# Altium PCB M8充电器.PcbDoc
Units mm, origin at the board's own origin, x right, y up, seen from the top; angles counter-clockwise.
Board outline 132.08 x 76.33 mm, 2 copper layers (Top Layer, Bottom Layer); 91 components, 64 nets, 274 pads, 42 vias.
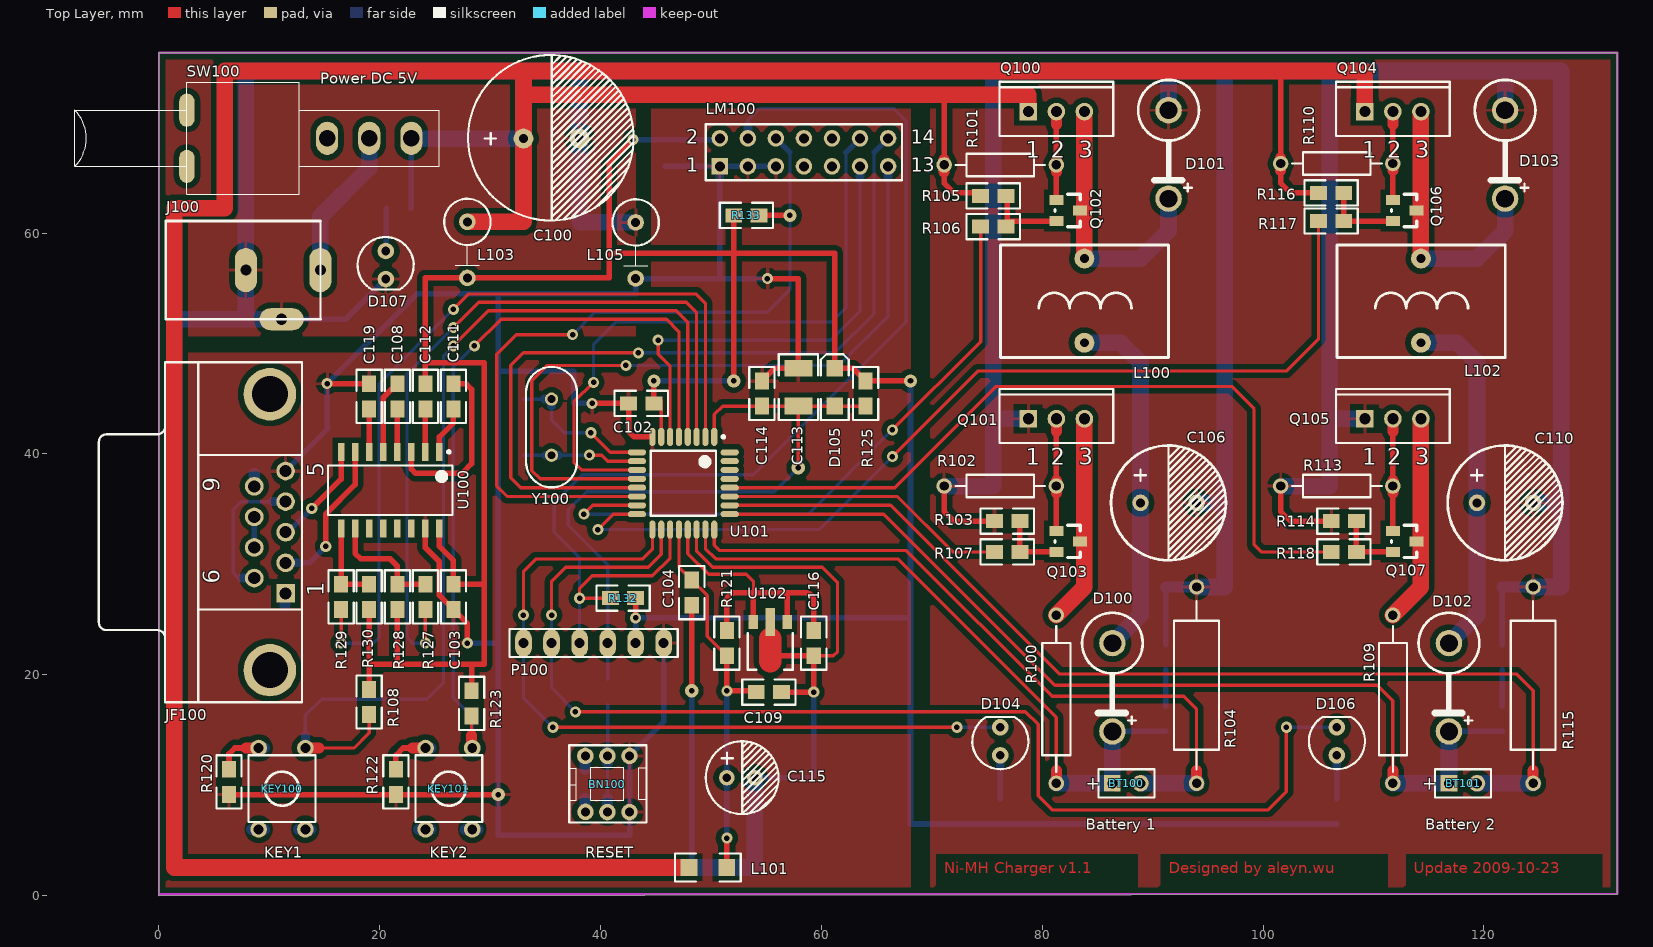
[diagram p0: Top Layer view]
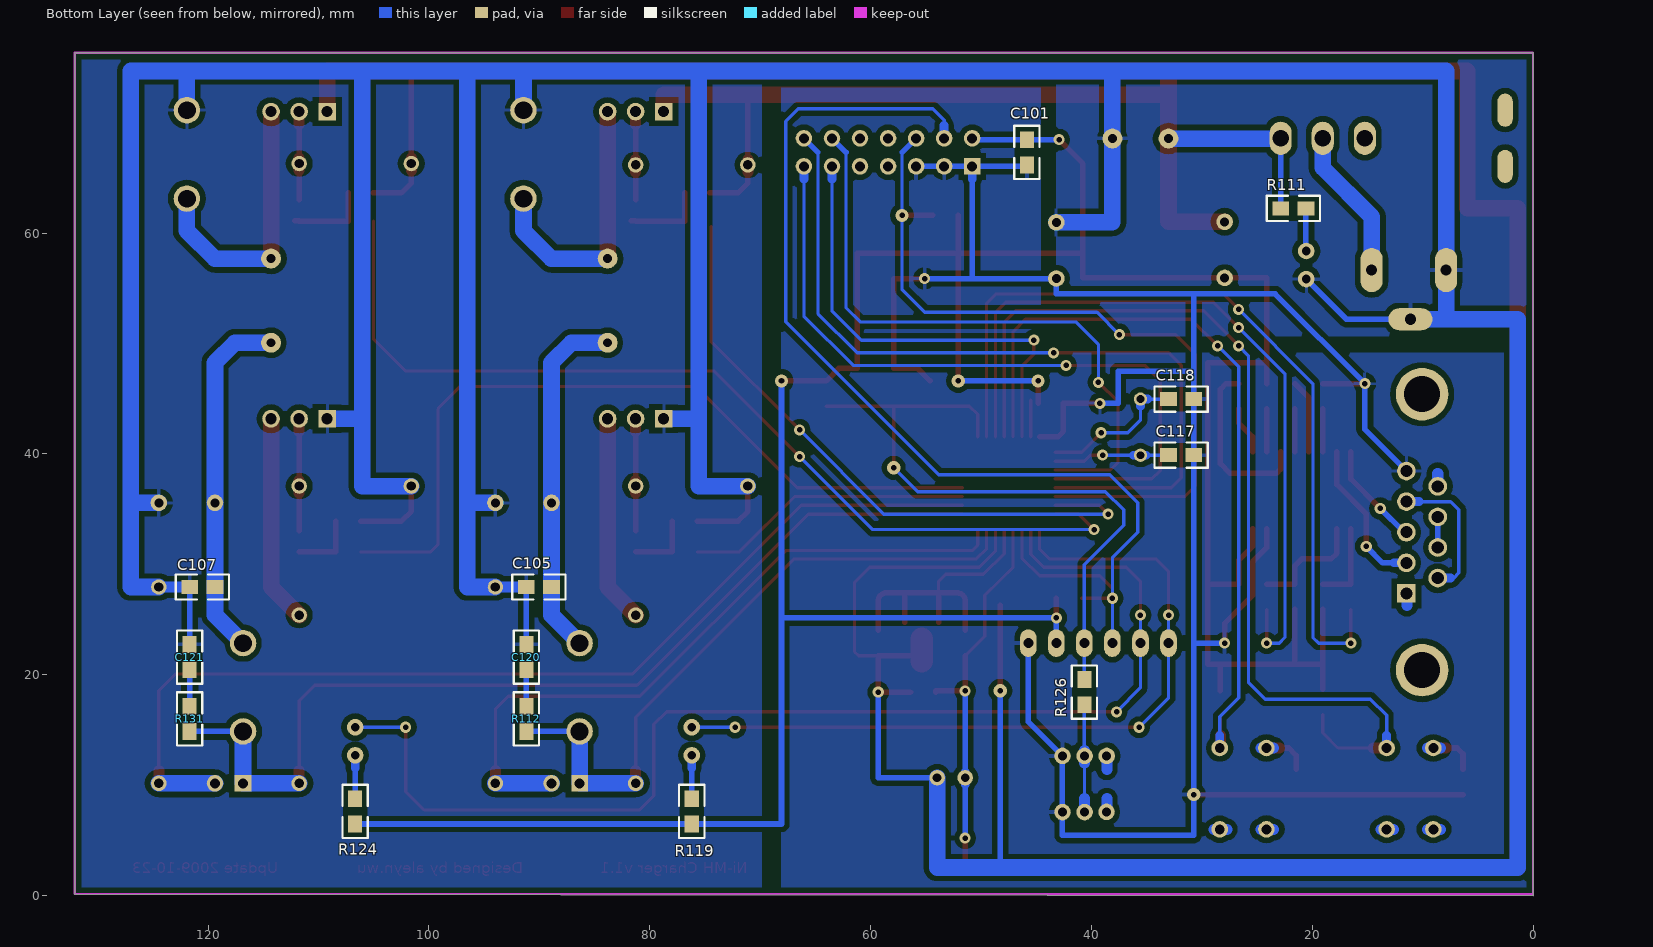
[diagram p1: Bottom Layer view, seen from below]

## Layer stack, top to bottom
Top Layer: signal copper 0.0356
Dielectric: dielectric 0.32, FR-4, Dk 4.8
Bottom Layer: signal copper 0.0356

## Board outline
0,0 132.08,0.127 132.08,76.327 0,76.327

## Design rules (kind name [scope] priority, off if disabled: settings)
Clearance Clearance_1 [InNamedPolygon('agnd1') Or InNamedPolygon('agnd2') Or  InNamedPolygon('agnd3') Or InNamedPolygon('agnd4') Or  InNamedPolygon('agnd5') Or InNamedPolygon('agnd6')] p1: gap=0.5
Clearance [All] p2: gap=0.3
PlaneConnect [All] p1: planeconnectstyle=Relief reliefexpansion=0.5 reliefentries=4 reliefconductorwidth=0.3 reliefairgap=0.3
PolygonConnect [All] p1: connectstyle=Relief reliefconductorwidth=0.3 reliefentries=4 polygonreliefangle="90 Angle"
RoomDefinition M8充电器 [InComponentClass('M8充电器')] p1: confinementstyle=ConfineIn formatcopy=TRUE lockcomponents=FALSE outline 0,0.127 132.08,0.127 132.08,76.327 0,76.327
RoutingVias [All] p1: holewidth=0.5 width=0.8 viastyle="Through Hole" minholewidth=0.5 minwidth=0.8 maxholewidth=1 maxwidth=1.5
SolderMaskExpansion [All] p1: expansion=0.102
TestPointUsage [All] p1: valid=0 allowmultiple=FALSE
Testpoint [All] p1: side=15 testpointundercomponent=TRUE minsize=1.016 maxsize=2.54 preferedsize=1.524 minholesize=0 maxholesize=1.016 preferedholesize=0.813 testpointgrid=0.025 style=1023 order=0123456789
Width [All] p1: maxlimit=1.5 minlimit=0.3 preferedwidth=0.5
18 further rules are at their usual default settings.

## Components (designator, comment, footprint, x,y, rotation, side; value= is the part's Value field where it differs from the comment)
BN100 "LUCKBUTTON" LBTN-01 44.164,6.609 r90 top
BT100 "Battery" BAT-2 87.63,10.16 r0 top
BT101 "Battery" BAT-2 118.11,10.16 r0 top
C100 "1000uF/50V" C1000uF/50V 33.02,68.555 r0 top
C101 "104" 0805 45.847,66.167 r90 bottom
C102 "104" 0805 42.545,44.577 r0 top
C103 "104" 0805 26.67,28.194 r270 top
C104 "104" 0805 48.26,28.575 r270 top
C105 "104" 0805 88.9,27.94 r0 bottom
C106 "470uF/35V" C1000uF/16V 88.9,35.56 r0 top
C107 "104" 0805 119.38,27.94 r0 bottom
C108 "105" 0805 21.59,44.069 r90 top
C109 "104" 0805 54.102,18.415 r0 top
C110 "470uF/35V" C1000uF/16V 119.38,35.56 r0 top
C111 "105" 0805 26.67,46.355 r270 top
C112 "105" 0805 24.13,44.069 r90 top
C113 "100uF" 1210 57.912,44.323 r90 top
C114 "0.1uF" 0805 54.61,44.323 r90 top
C115 "10u" C100UF/10V 53.975,10.668 r0 top
C116 "103" 0805 59.309,21.717 r90 top
C117 "22pF" 0805 33.02,39.878 r180 bottom
C118 "22pF" 0805 33.02,44.958 r180 bottom
C119 "105" 0805 19.05,46.355 r270 top
C120 "104" 0805 91.186,20.447 r90 bottom
C121 "104" 0805 121.666,20.447 r90 bottom
D100 "1N5819" IN5822 86.36,22.86 r270 top
D101 "1N5819" IN5822 91.44,71.12 r270 top
D102 "1N5819" IN5822 116.84,22.86 r270 top
D103 "1N5819" IN5822 121.92,71.12 r270 top
D104 "Red_LED" LED2#1 76.2,12.7 r90 top
D105 "4148" 1206D 61.214,44.323 r90 top
D106 "Red_LED" LED2#1 106.68,12.7 r90 top
D107 "Yellow_LED" LED2#2 19.558,58.42 r270 top
J100 "POWER_CON" POWER_CON 0.624,52.192 r0 top
JF100 "RS232 COM" DSUB1.385-2H9 0.556,32.905 r90 top
KEY100 "" BUTTON1 8.128,12.7 r270 top
KEY101 "" BUTTON1 23.241,12.7 r270 top
L100 "100uH/2A" INDU20UH 83.82,57.683 r180 top
L101 "10uH" 1206 48.006,2.54 r0 top
L102 "100uH/2A" INDU20UH 114.3,57.683 r180 top
L103 "0uH" RES_V1W 27.94,61.011 r270 top
L105 "0uH" RES_V1W 43.18,60.96 r270 top
LM100 "TC1602" HDR2X7 50.8,66.04 r0 top
P100 "ISP" HDR1X6 33.02,22.86 r0 top
Q100 "2SB772" TO-262-AA 81.28,70.993 r0 top
Q101 "2SD882" TO-262-AA 81.28,43.18 r0 top
Q102 "2SA1015" SOT-23/2 81.28,62.992 r270 top
Q103 "2SC1815" SOT-23/2 81.28,33.02 r270 top
Q104 "2SB772" TO-262-AA 111.76,70.993 r0 top
Q105 "2SD882" TO-262-AA 111.76,43.18 r0 top
Q106 "2SA1015" SOT-23/2 111.76,62.992 r270 top
Q107 "2SC1815" SOT-23/2 111.76,33.02 r270 top
R100 "10R / 1W" AXIAL-0.6 81.28,17.78 r270 top
R101 "100R" AXIAL-0.4 76.2,66.167 r0 top
R102 "100R" AXIAL-0.4 76.2,37.084 r0 top
R103 "10K" 0805 75.692,33.909 r0 top
R104 "0.47R / 3W" AXIAL-0.7 93.98,19.05 r270 top
R105 "10K" 0805 74.422,63.373 r0 top
R106 "1k" 0805 76.708,60.579 r180 top
R107 "1K" 0805 75.692,31.115 r0 top
R108 "10K" 0805 19.05,18.669 r270 top
R109 "10R / 1W" AXIAL-0.6 111.76,17.78 r270 top
R110 "100R" AXIAL-0.4 106.68,66.294 r0 top
R111 "330R" 0805 20.574,62.23 r0 bottom
R112 "100K" 0805 91.186,14.859 r90 bottom
R113 "100R" AXIAL-0.4 106.68,37.084 r0 top
R114 "10K" 0805 106.172,33.909 r0 top
R115 "0.47R / 3W" AXIAL-0.7 124.46,19.05 r270 top
R116 "10K" 0805 105.029,63.627 r0 top
R117 "1k" 0805 107.315,61.087 r180 top
R118 "1K" 0805 106.172,31.115 r0 top
R119 "330R" 0805 76.2,8.763 r270 bottom
R120 "150R" 0805 6.35,11.43 r270 top
R121 "100R" 0805 51.435,21.717 r90 top
R122 "150R" 0805 21.463,11.43 r270 top
R123 "10K" 0805 28.321,18.542 r270 top
R124 "330R" 0805 106.68,8.763 r270 bottom
R125 "10K" 0805 64.008,46.609 r270 top
R126 "150R" 0805 40.64,17.272 r90 bottom
R127 "100R" 0805 24.13,25.908 r90 top
R128 "10K" 0805 21.59,25.908 r90 top
R129 "100R" 0805 16.51,25.908 r90 top
R130 "10K" 0805 19.05,28.194 r270 top
R131 "100K" 0805 121.666,14.859 r90 bottom
R132 "10K" 0805 43.18,26.924 r180 top
R133 "10K" 0805 52.07,61.595 r0 top
SW100 "PWR_SWITH" POWER_SWITCH2 20.32,71.12 r180 top
U100 "MAX232CSE" SO-16 20.955,36.703 r180 top
U101 "ATmega8-16PI" 32A_N 47.498,37.338 r270 top
U102 "TL431A" SOT-89 56.896,24.765 r180 top
Y100 "16M" XTAL 35.56,44.958 r270 top

## Footprints (in the part's own frame and the unit in brackets; to place one, negate y for a bottom-side part, rotate by r counter-clockwise, add the part's x,y. Pads: shape width x height; smd on the part's side, far side on the other; paste and mask are expansions set on the pad)
32A_N [mm] "Thin QFP, 32-Leads, Body 7x7mm, Pitch 0.8mm, IPC Medium Density"
  oval 1.65x0.55 smd: 1(-4.2,2.8) 2(-4.2,2) 3(-4.2,1.2) 4(-4.2,0.4) 5(-4.2,-0.4) 6(-4.2,-1.2) 7(-4.2,-2) 8(-4.2,-2.8) 17(4.2,-2.8) 18(4.2,-2) 19(4.2,-1.2) 20(4.2,-0.4) 21(4.2,0.4) 22(4.2,1.2) 23(4.2,2) 24(4.2,2.8)
  oval 0.55x1.65 smd: 9(-2.8,-4.2) 10(-2,-4.2) 11(-1.2,-4.2) 12(-0.4,-4.2) 13(0.4,-4.2) 14(1.2,-4.2) 15(2,-4.2) 16(2.8,-4.2) 25(2.8,4.2) 26(2,4.2) 27(1.2,4.2) 28(0.4,4.2) 29(-0.4,4.2) 30(-1.2,4.2) 31(-2,4.2) 32(-2.8,4.2)
  silkscreen extent -4.32,-2.95 2.95,3.75, body extent -3.5,-3.5 3.5,3.5, height 1.2
0805 [mil]
  rect 60x50 smd: 1(0,0) 2(90,0)
  silkscreen extent -50,-45 140,45
1206 [mil]
  rect 60x60 smd: 1(0,0) 2(135,0)
  silkscreen extent -50,-50 185,50
1206D [mil]
  rect 60x60 smd: 1(0,0) 2(135,0)
  silkscreen extent -50,-50 185,50
1210 [mil]
  rect 60x100 smd: 1(0,0) 2(135,0)
  silkscreen extent -50,-70 185,70
AXIAL-0.4 [mm] "Resistor; 2 Leads"
  round 1.4 hole 0.85: 1(-5.08,0) 2(5.08,0)
  silkscreen extent -4.06,-1.02 4.06,1.02
AXIAL-0.6 [mm] "Variable Resistor; 2 Leads"
  round 1.4 hole 0.85: 1(-7.62,0) 2(7.62,0)
  silkscreen extent -6.6,-1.27 6.6,1.27
AXIAL-0.7 [mm] "Variable Resistor; 2 Leads"
  round 1.4 hole 0.85: 1(-8.89,0) 2(8.89,0)
  silkscreen extent -7.62,-2.03 7.62,2.03
BAT-2 [mm] "Multicell Battery; 2 Leads"
  rect 1.5x1.5 hole 0.9: 1(-1.27,0)
  round 1.5 hole 0.9: 2(1.27,0)
  silkscreen extent -2.54,-1.27 2.54,1.27
BUTTON1 [mm] "Button 6.05 * 6.05 * 5.00 (Small Size)"
  round 1.5 hole 0.9: 1(-0.66,0.91) 2(-0.66,5.14) 3(6.71,0.91) 4(6.71,5.14)
  silkscreen extent 0,0 6.05,6.05
C100UF/10V [mm]
  round 1.4 hole 0.8: 1(-2.54,0) 2(0,0)
  silkscreen extent -4.45,-3.3 2.15,3.3
C1000uF/16V [mm] "C1000uF/16V"
  round 1.5 hole 0.8: 1(0,0) 2(5.08,0)
  silkscreen extent -2.66,-5.2 7.74,5.2
C1000uF/50V [mm]
  round 1.8 hole 0.8: 1(0,0) 2(5.08,0)
  silkscreen extent -5.02,-7.42 9.98,7.58
DSUB1.385-2H9 [mm] "Connector; D Subminiature; 9 Position; Right Angle; Pitch 1.385 mm"
  rect 1.69x1.69 hole 1.09: 1(-5.54,-10.92)
  round 1.69 hole 1.09: 2(-2.77,-10.92) 3(0,-10.92) 4(2.77,-10.92) 5(5.54,-10.92) 6(-4.155,-8.08) 7(-1.385,-8.08) 8(1.385,-8.08) 9(4.155,-8.08)
  round 4.76 hole 3.26: 10(-12.495,-9.5) 11(12.495,-9.5)
  silkscreen extent -15.4,-12.4 15.4,6
HDR1X6 [mm] "Connector; Header; 6 Position"
  oval 1.5x2.5 hole 0.9: 1(0,0) 2(2.54,0) 3(5.08,0) 4(7.62,0) 5(10.16,0) 6(12.7,0)
  silkscreen extent -1.27,-1.27 13.97,1.27
HDR2X7 [mm] "Connector; Header; 7x2 Position"
  rect 1.5x1.5 hole 0.9: 1(0,0)
  round 1.5 hole 0.9: 2(0,2.54) 3(2.54,0) 4(2.54,2.54) 5(5.08,0) 6(5.08,2.54) 7(7.62,0) 8(7.62,2.54) 9(10.16,0) 10(10.16,2.54) 11(12.7,0) 12(12.7,2.54) 13(15.24,0) 14(15.24,2.54)
  silkscreen extent -1.27,-1.27 16.51,3.81
IN5822 [mm]
  round 2.4 hole 1.6: 1(0,0) 2(8.001,0)
  silkscreen extent -2.75,-2.75 7.33,2.75
INDU20UH [mm]
  round 1.8 hole 0.8: 1(0,0) 2(0,7.62)
  silkscreen extent -7.63,-1.24 7.61,8.96
LBTN-01 [mm] "Self Luck Button and Self Release Button"
  round 1.5 hole 0.8: 1(0.96,5.53) 2(0.95,3.54) 3(0.95,1.54) 4(6.03,1.54) 5(6.03,3.54) 6(6.03,5.54)
  silkscreen extent 0,0 7,7
LED2#1 [mm]
  round 1.5 hole 0.8: 1(0,0) 2(2.54,0)
  silkscreen extent -1.26,-2.55 3.48,2.53
LED2#2 [mm]
  round 1.5 hole 0.8: 1(0.05,0.99) 2(2.59,0.99)
  silkscreen extent -1.21,-1.56 3.53,3.52
POWER_CON [mm]
  oval 4x2 hole 1: 1(10.49,0)
  oval 2x4 hole 1: 2(7.25,4.45) 3(14,4.45)
  silkscreen extent 0,0 14,8.9
POWER_SWITCH2 [mm]
  oval 1x2.5 on Keep-Out: 0(17.78,0) 0(17.78,5.08)
  oval 1.4x3 all layers, no hole: 0(17.78,0) 0(17.78,5.08)
  oval 2x3 hole 1.5: 1(-2.54,2.54) 2(1.27,2.54) 3(5.08,2.54)
  silkscreen extent -5.08,-2.54 27.94,7.62
RES_V1W [mm]
  round 1.5 hole 0.8: 1(0,0) 2(5.08,0)
  silkscreen extent -2.1,-2.1 3.91,2.1
SO-16 [mm] "Small Outline; 16 Leads; Body Width 5.6 mm; Pitch 1.27 mm"
  rect 0.6x1.65 smd: 1(-4.445,-3.475) 2(-3.175,-3.475) 3(-1.905,-3.475) 4(-0.635,-3.475) 5(0.635,-3.475) 6(1.905,-3.475) 7(3.175,-3.475) 8(4.445,-3.475) 9(4.445,3.475) 10(3.175,3.475) 11(1.905,3.475) 12(0.635,3.475) 13(-0.635,3.475) 14(-1.905,3.475) 15(-3.175,3.475) 16(-4.445,3.475)
  silkscreen extent -5.65,-3.6 5.65,2.25
SOT-23/2 [mil] "SOT-23 Modified"
  rect 36x50 smd: 1(0,0) 2(75,0) 3(38,84.25)
  silkscreen extent -20,-5 95,85
SOT-89 [mil]
  rect 34x50 smd: 1(0,0) 3(120,0)
  rect 34x100 smd: 2(60,0)
  Top Layer lines w80: 60,140 60,120 60,60
  silkscreen extent -20,40 140,170
TO-262-AA [mm] "TO, Thru-Hole, Vertical, Heatsink Mounted; 3 In-Line Leads; Pitch 2.54 mm"
  rect 1.6x1.6 hole 1: 1(-2.54,0)
  round 1.6 hole 1: 2(0,0) 3(2.54,0)
  silkscreen extent -5.15,-2.2 5.15,2.7
XTAL [mm]
  round 1.2 hole 0.7: 1(0,0) 2(5.08,0)
  silkscreen extent -2.92,-2.3 7.99,2.3

## Part data
BT100 BT101: "Multicell Battery"
C100 C113 C115: library part "Cap Pol1", "Polarized Capacitor (Radial)"
C101 C102 C103 C104 C108 C111 C112 C114 C116 C117 C118 C119: library part Cap, "Capacitor"
C105 C107 C120 C121: library part CAP, "Capacitor"
C106 C110: library part ELECTRO1, "Electrolytic Capacitor"
C109: library part CAP
D100 D101 D102 D103: library part "DIODE SCHOTTKY", "Schottky Diode"
D104 D106 D107: library part LED0, "Typical INFRARED GaAs LED"
D105: library part "Diode 1N4001", "1 Amp General Purpose Rectifier"
J100: "Power Connect"
KEY100 KEY101: library part SW-PB
L100 L102: library part INDUCTOR2
L101: library part INDUCTOR
L103 L105: library part Inductor, "Inductor"
LM100: library part TC1602B, "LCD TC1602B"
P100: library part "Header 6", "Header, 6-Pin"
Q100 Q102 Q104 Q106: library part 2N3906, "PNP General Purpose Amplifier"
Q101 Q103 Q105 Q107: library part 2N3904, "NPN General Purpose Amplifier"
R100 R104 R105 R106 R109 R115 R116 R117 R121: library part RES5
R101 R102 R103 R107 R108 R110 R112 R113 R114 R118 R120 R122 R123 R125 R126 R127 R128 R129 R130 R131 R132 R133: library part Res2, "Resistor"
R111 R119 R124: library part RES2
SW100: "Power Switch"
U100: library part MAX232CPE, "+5V Powered RS-232 Driver/Receiver"
U101: "8-Bit AVR Microcontroller with 8K Bytes of In-System Programmable Flash Memory"
U102: library part TL431
Y100: library part XTAL, "Crystal Oscillator"

## Via types
v1: diameter 1, hole 0.5, Top Layer to Bottom Layer, 35 vias
v2: diameter 1.2, hole 0.5, Top Layer to Bottom Layer, 7 vias

## Nets (pads, with @x,y where several pads share a name; then routed paths per layer and width w, separated by ;. In a path a pad name is that pad's centre, name@x,y a point inside that pad or via, vN(x,y) a via of type N, cw(c..) or ccw(c..) an arc to the next point about the centre after c; other vN are vias at no path point)
5V: C100.1 L101.1 L103.1 Q100.1 Q104.1 R101.1 R105.1 R110.1 R111.2 R116.1 SW100.1 | length 356.2
  Top Layer w0.5: 71.12,72.517 R101.1 71.12,64.516 72.009,63.627 74.422,63.627 R105.1@74.549,63.627 ; 101.6,74.676 R110.1 101.6,64.516 102.489,63.627 R116.1
  Top Layer w1: R101.1@71.12,65.532 R101.1 R101.1@71.12,66.675 ; R110.1@101.6,65.659 R110.1 R110.1@101.6,66.802
  Top Layer w1.5: SW100.1 SW100.1@22.885,68.555 ; L103.1 33.02,61.011 C100.1 33.02,72.517 ; 33.147,72.517 33.02,72.517 ; L101.1 1.397,2.54 1.397,62.23 5.969,62.23 5.969,74.676 33.02,74.676 ; Q100.1 78.74,72.517 ; Q104.1 109.22,74.676 ; 33.02,72.517 33.02,74.676 ; 33.02,72.517 71.12,72.517 ; 33.02,74.676 101.6,74.676 ; 71.12,72.517 78.74,72.517 ; 71.12,72.517 78.74,72.517 ; 101.6,74.676 109.22,74.676 ; 101.6,74.676 109.22,74.676
  Bottom Layer w0.5: R111.2 SW100.1
  Bottom Layer w1.5: SW100.1@22.885,68.555 C100.1
AGND: C100.2 C104.2 C105.2 C106.2 C107.2 C109.2 C110.2 C115.2 C116.1 C120.2 C121.2 D101.1 D103.1 D107.2 J100.1 J100.2 L105.1 Q101.1 Q105.1 R102.1 R103.1 R104.1 R113.1 R114.1 R115.1 U101.22 U102.2 | length 602.1
  Top Layer w0.3: U101.22 48.698,31.185 50.165,29.718 60.071,29.718 61.468,28.321 61.468,22.098 61.087,21.717 C116.1
  Top Layer w0.5: v2(48.26,18.542) C104.2 ; 55.372,21.717 C116.1 v1(59.309,18.415) C109.2 ; R102.1 71.12,34.798 72.009,33.909 R103.1 ; R113.1 101.6,34.798 102.489,33.909 R114.1
  Bottom Layer w0.5: J100.1 16.91,52.192 D107.2 ; 48.26,2.54 v2(48.26,18.542) ; C115.2 59.309,10.668 v1(59.309,18.415) ; C120.2 C105.2 ; C121.2 C107.2
  Bottom Layer w1: C105.2 R104.1 ; C107.2 R115.1
  Bottom Layer w1.5: J100.1 7.874,52.192 ; L105.1 38.1,60.96 C100.2 38.1,74.676 ; C115.2 53.975,2.54 48.26,2.54 1.397,2.54 1.397,52.192 7.874,52.192 ; R102.1 75.565,37.084 75.565,43.18 ; Q101.1 75.565,43.18 ; 83.185,74.676 75.565,74.676 ; D101.1 91.44,74.676 ; R104.1 96.52,27.94 96.52,35.56 ; C106.2 96.52,35.56 ; R113.1 106.045,37.084 106.045,43.18 ; Q105.1 106.045,43.18 ; D103.1 121.92,74.676 ; R115.1 127,27.94 127,35.56 ; C110.2 127,35.56 ; 7.874,52.192 J100.2 7.874,74.676 38.1,74.676 ; 38.1,74.676 75.565,74.676 ; 75.565,43.18 75.565,74.676 ; 75.565,74.676 91.44,74.676 ; 91.44,74.676 96.52,74.676 ; 96.52,35.56 96.52,74.676 ; 96.52,74.676 106.045,74.676 ; 106.045,43.18 106.045,74.676 ; 106.045,74.676 121.92,74.676 ; 121.92,74.676 127,74.676 127,35.56
AVCC: C104.1 C109.1 C115.1 L101.2 R121.1 U101.20 | length 36.3
  Top Layer w0.3: U101.20 47.098,29.737 C104.1 49.657,27.178 49.657,23.495 R121.1
  Top Layer w0.5: L101.2 v1(51.435,5.207) ; R121.1 v1(51.435,18.542) 54.102,18.542 C109.1
  Bottom Layer w0.5: v1(51.435,5.207) C115.1 v1(51.435,18.542)
  Bottom Layer w0.8: C115.1@51.435,10.033 C115.1 C115.1@51.435,11.176
BATT1: BT100.1 D100.2 R100.2 R112.1 U101.23 | length 61.6
  Top Layer w0.3: U101.23 49.498,31.401 50.419,30.48 66.929,30.48 81.28,16.129 R100.2
  Top Layer w1: R100.2 81.28,11.303
  Bottom Layer w0.5: D100.2 R112.1
  Bottom Layer w1.5: R100.2 BT100.1 D100.2
BATT2: BT101.1 D102.2 R109.2 R131.1 U101.25 | length 90.3
  Top Layer w0.3: U101.25 65.665,34.538 81.153,19.05 110.363,19.05 111.76,17.653 R109.2
  Top Layer w1: R109.2 111.76,11.303
  Bottom Layer w0.5: D102.2 R131.1
  Bottom Layer w1.5: R109.2 BT101.1 D102.2
CHR1: R106.2 U101.15 | length 58
  Top Layer w0.3: v1(38.481,34.544) 39.275,35.338 U101.15 ; v1(66.421,42.164) 74.422,50.165 R106.2
  Bottom Layer w0.3: v1(38.481,34.544) 58.801,34.544 v1(66.421,42.164)
CHR2: R117.2 U101.16 | length 87.2
  Top Layer w0.3: v1(39.751,33.147) 41.142,34.538 U101.16 ; v1(66.421,39.751) 74.168,47.498 102.108,47.498 105.029,50.419 R117.2
  Bottom Layer w0.3: v1(39.751,33.147) 59.817,33.147 v1(66.421,39.751)
CTS: JF100.7 JF100.8 | length 2.8
  Bottom Layer w0.5: JF100.7 JF100.8
CUR1: BT100.2 R104.2 U101.24 | length 64.2
  Top Layer w0.3: U101.24 50.298,31.744 50.8,31.242 67.691,31.242 80.899,18.034 92.837,18.034 93.98,16.891 R104.2
  Top Layer w1: R104.2 93.98,11.303
  Bottom Layer w1.5: BT100.2 R104.2
CUR2: BT101.2 R115.2 U101.26 | length 94.3
  Top Layer w0.3: U101.26 66.262,35.338 81.534,20.066 122.936,20.066 124.46,18.542 R115.2
  Top Layer w1: R115.2 124.46,11.303
  Bottom Layer w1.5: BT101.2 R115.2
D4: LM100.11 U101.6 | length 42.8
  Top Layer w0.3: v1(45.212,50.292) 45.212,49.022 46.298,47.936 U101.6
  Bottom Layer w0.3: v1(45.212,50.292) 60.833,50.292 63.5,52.959 LM100.11
  Bottom Layer w0.8: 63.5,64.897 LM100.11
D5: LM100.12 U101.11 | length 57.5
  Top Layer w0.3: v1(39.37,46.482) 37.592,44.704 37.592,39.243 38.297,38.538 U101.11
  Bottom Layer w0.3: v1(39.37,46.482) 39.37,49.911 41.402,51.943 60.96,51.943 62.23,53.213 62.23,67.31
  Bottom Layer w0.5: 62.23,67.31 LM100.12
D6: LM100.13 U101.12 | length 67.4
  Top Layer w0.3: v1(42.291,48.006) 35.179,48.006 33.782,46.609 33.782,38.481 34.525,37.738 U101.12
  Bottom Layer w0.3: v1(42.291,48.006) 61.595,48.006 66.04,52.451 LM100.13
  Bottom Layer w0.8: 66.04,64.897 LM100.13
D7: LM100.14 U101.13 | length 73.2
  Top Layer w0.3: U101.13 32.785,36.938 31.877,37.846 31.877,48.006 33.02,49.149 v1(43.434,49.149)
  Bottom Layer w0.3: v1(43.434,49.149) 61.214,49.149 64.77,52.705 64.77,67.31
  Bottom Layer w0.5: 64.77,67.31 LM100.14
DCHR1: R107.1 U101.27 | length 26.1
  Top Layer w0.3: U101.27 66.859,36.138 71.882,31.115 R107.1
DCHR2: R118.1 U101.28 | length 71.7
  Top Layer w0.3: U101.28 66.656,36.938 75.819,46.101 97.155,46.101 99.187,44.069 99.187,31.75 99.822,31.115 R118.1
DSR: JF100.4 JF100.6 | length 15.2
  Bottom Layer w0.3: JF100.6 7.191,28.75 6.731,29.21 6.731,34.925 7.481,35.675 JF100.4
  Bottom Layer w0.8: 7.493,28.75 JF100.6 ; 10.333,35.675 JF100.4
EE: LM100.6 R133.2 U101.14 | length 71
  Top Layer w0.3: v1(37.465,50.8) 32.385,50.8 30.607,49.022 30.607,37.084 31.553,36.138 U101.14
  Top Layer w0.5: R133.2 v2(57.15,61.595)
  Bottom Layer w0.3: v1(37.465,50.8) 39.497,52.832 55.118,52.832 57.15,54.864 57.15,67.31
  Bottom Layer w0.5: LM100.6 57.15,67.31
GND: BN100.3 BN100.4 C101.1 C102.1 C103.2 C113.2 C114.2 C117.2 C118.2 C119.1 JF100.5 L105.2 LM100.1 LM100.3 LM100.5 P100.6 R120.2 R122.2 U100.15 U101.8 | length 232.3
  Top Layer w0.5: R120.2 R122.2 v2(30.734,9.144) ; v1(15.24,46.355) C119.1 ; U100.15 24.13,31.496 25.4,30.226 25.4,27.178 C103.2 27.94,24.638 v1(27.94,22.86) ; v1(39.243,44.577) C102.1 42.545,42.037 43.044,41.538 U101.8 ; C114.2 55.753,47.752 C113.2 57.912,55.88 v1(55.118,55.88)
  Bottom Layer w0.5: JF100.5 15.24,42.209 v1(15.24,46.355) 23.368,54.483 30.734,54.483 ; v1(27.94,22.86) 30.734,22.86 ; v1(39.243,44.577) 37.592,44.577 37.592,47.498 30.734,47.498 ; P100.6 45.72,15.735 BN100.4 BN100.3 42.624,5.461 30.734,5.461 v2(30.734,9.144) 30.734,22.86 ; C101.1@45.847,66.04 LM100.1 ; v1(55.118,55.88) 50.8,55.88 ; LM100.5 LM100.3 LM100.1 ; 30.734,22.86 C117.2 C118.2 30.734,47.498 ; 30.734,47.498 30.734,54.483 ; 30.734,54.483 43.18,54.483 L105.2 50.8,55.88 ; 50.8,55.88 LM100.1
  Bottom Layer w0.8: 50.8,64.897 LM100.1
KEY1: KEY100.2 R108.2 U101.4 | length 91.2
  Top Layer w0.3: KEY100.2 17.678,13.36 19.05,14.732 R108.2 ; v1(26.67,49.784) 29.845,52.959 46.863,52.959 47.898,51.924 U101.4
  Top Layer w1: KEY100.2@13.335,13.36 14.478,13.36
  Bottom Layer w0.3: KEY100.2 13.268,16.316 14.732,17.78 24.257,17.78 25.781,19.304 25.781,48.895 v1(26.67,49.784)
  Bottom Layer w0.8: KEY100.2 13.268,14.503
KEY2: KEY101.2 R123.2 U101.5 | length 72.7
  Top Layer w0.3: R123.2 28.321,13.36 KEY101.2 ; v1(28.575,49.784) 30.988,52.197 45.974,52.197 47.098,51.073 U101.5
  Top Layer w1: KEY101.2@28.321,13.335 28.321,13.36 28.321,14.478
  Bottom Layer w0.3: KEY101.2 28.381,16.196 26.67,17.907 26.67,47.879 v1(28.575,49.784)
  Bottom Layer w0.8: KEY101.2 28.381,14.503
NetBN100_2: BN100.2 BN100.5 R126.1 | length 12
  Bottom Layer w0.3: BN100.2 BN100.5 40.64,12.655 R126.1
  Bottom Layer w1: BN100.5@40.624,12.004 BN100.5 BN100.5@40.624,13.147 ; BN100.2@40.64,7.62 40.64,8.763
NetC105_1: C105.1 C106.1 D100.1 L100.2 | length 32.3
  Bottom Layer w1.5: L100.2 87.097,50.063 88.9,48.26 C106.1 C105.1 88.9,25.4 D100.1
NetC107_1: C107.1 C110.1 D102.1 L102.2 | length 32.3
  Bottom Layer w1.5: L102.2 117.577,50.063 119.38,48.26 C110.1 C107.1 119.38,25.4 D102.1
NetC108_1: C108.1 U100.4 | length 3.9
  Top Layer w0.5: U100.4 C108.1
NetC108_2: C108.2 U100.5 | length 6.7
  Top Layer w0.5: U100.5 20.32,45.085 C108.2
NetC111_1: C111.1 U100.3 | length 16.1
  Top Layer w0.5: U100.3 22.86,38.608 23.241,38.227 27.432,38.227 28.321,39.116 28.321,45.847 27.813,46.355 C111.1
NetC111_2: C111.2 U100.1 | length 4.4
  Top Layer w0.5: U100.1 25.4,41.529 26.67,42.799 C111.2
NetC112_1: C112.1 U100.2 | length 3.9
  Top Layer w0.5: U100.2 C112.1
NetC119_2: C119.2 U100.6 | length 3.9
  Top Layer w0.5: U100.6 C119.2
NetC120_1: C120.1 R112.2 | length 3.3
  Bottom Layer w0.5: R112.2 C120.1
NetC121_1: C121.1 R131.2 | length 3.3
  Bottom Layer w0.5: R131.2 C121.1
NetD101_2: D101.2 L100.1 Q100.3 Q102.3 | length 24.9
  Top Layer w1.5: L100.1 83.82,62.027 Q100.3
  Bottom Layer w1.5: L100.1 88.925,57.683 91.44,60.198 D101.2
NetD103_2: D103.2 L102.1 Q104.3 Q106.3 | length 24.9
  Top Layer w1.5: L102.1 114.3,62.027 Q104.3
  Bottom Layer w1.5: L102.1 119.405,57.683 121.92,60.198 D103.2
NetD104_1: D104.1 R119.1 | length 5.1
  Bottom Layer w0.5: R119.1 D104.1
  Bottom Layer w0.8: 76.2,11.557 D104.1
NetD106_1: D106.1 R124.1 | length 5.1
  Bottom Layer w0.5: R124.1 D106.1
  Bottom Layer w0.8: 106.68,11.557 D106.1
NetD107_1: D107.1 R111.1 | length 3.9
  Top Layer w0.5: D107.1 D107.1@20.574,58.37
  Bottom Layer w0.5: D107.1@20.574,58.37 R111.1
NetKEY100_1: KEY100.1 R120.1 | length 6.6
  Top Layer w0.5: R120.1 6.35,12.827 6.883,13.36 KEY100.1
  Top Layer w1: 7.874,13.36 KEY100.1@9.017,13.36
  Bottom Layer w1: KEY100.1@8.403,13.36 KEY100.1 KEY100.1@9.546,13.36
NetKEY101_1: KEY101.1 R122.1 | length 6.5
  Top Layer w0.5: R122.1 21.463,12.7 22.123,13.36 KEY101.1
  Top Layer w1: 22.987,13.36 KEY101.1@24.13,13.36
  Bottom Layer w1: KEY101.1@23.516,13.36 KEY101.1 KEY101.1@24.659,13.36
NetQ100_2: Q100.2 Q102.1 R101.2 | length 10.3
  Top Layer w0.5: Q102.1 R101.2 Q100.2
  Top Layer w1: R101.2@81.28,65.532 R101.2 R101.2@81.28,66.675 ; 81.28,69.85 Q100.2
NetQ101_2: Q101.2 Q103.1 R102.2 | length 12.4
  Top Layer w0.5: Q103.1 R102.2 Q101.2
  Top Layer w1: R102.2@81.28,36.449 R102.2 R102.2@81.28,37.592 ; 81.28,42.037 Q101.2
NetQ101_3: Q101.3 Q103.3 R100.1 | length 18.8
  Top Layer w1.5: R100.1 83.82,27.94 83.82,32.055 Q101.3
NetQ102_2: Q102.2 R105.2 R106.1 | length 7.4
  Top Layer w0.5: R105.2@76.835,63.627 76.835,61.087 Q102.2 81.305,61.112 Q102.2@81.661,61.112
NetQ103_2: Q103.2 R103.2 R107.2 | length 6.1
  Top Layer w0.5: R103.2 R107.2 Q103.2
NetQ104_2: Q104.2 Q106.1 R110.2 | length 10.3
  Top Layer w0.5: Q106.1 R110.2 Q104.2
  Top Layer w1: R110.2@111.76,65.659 R110.2 R110.2@111.76,66.802 ; 111.76,69.85 Q104.2
NetQ105_2: Q105.2 Q107.1 R113.2 | length 12.4
  Top Layer w0.5: Q107.1 R113.2 Q105.2
  Top Layer w1: R113.2@111.76,36.449 R113.2 R113.2@111.76,37.592 ; 111.76,42.037 Q105.2
NetQ105_3: Q105.3 Q107.3 R109.1 | length 18.8
  Top Layer w1.5: R109.1 114.3,27.94 114.3,32.055 Q105.3
NetQ106_2: Q106.2 R116.2 R117.1 | length 7.4
  Top Layer w0.5: R116.2 R117.1 Q106.2 111.785,61.112 Q106.2@112.141,61.112
NetQ107_2: Q107.2 R114.2 R118.2 | length 6.1
  Top Layer w0.5: R114.2 R118.2 Q107.2
NetR127_2: R127.2 R128.2 U100.10 | length 10.7
  Top Layer w0.5: U100.10 17.78,30.988 18.288,30.48 20.955,30.48 21.59,29.845 R128.2 R127.2
NetR129_2: R129.2 R130.1 U100.9 | length 7.6
  Top Layer w0.5: U100.9 R129.2 R130.1
RLED1: D104.2 P100.1 U101.17 | length 70
  Top Layer w0.3: v1(33.02,25.4) 33.02,29.337 34.163,30.48 43.815,30.48 44.698,31.363 U101.17 ; v1(35.687,15.24) v1(72.263,15.24)
  Bottom Layer w0.3: v1(33.02,25.4) P100.1 33.02,17.907 v1(35.687,15.24) ; v1(72.263,15.24) D104.2
RLED2: D106.2 P100.2 U101.18 | length 108.9
  Top Layer w0.3: v1(35.56,25.4) 35.56,28.448 36.83,29.718 44.323,29.718 45.498,30.893 U101.18 ; v1(37.719,16.637) 78.486,16.637 79.629,15.494 79.629,9.017 80.899,7.747 100.457,7.747 102.108,9.398 v1(102.108,15.24)
  Bottom Layer w0.3: v1(35.56,25.4) P100.2 35.56,18.796 v1(37.719,16.637) ; v1(102.108,15.24) D106.2
RS: LM100.4 P100.3 R132.2 U101.19 | length 104.1
  Top Layer w0.3: R132.2 v1(38.1,26.924) 38.1,27.813 39.243,28.956 44.704,28.956 46.298,30.55 U101.19
  Bottom Layer w0.3: P100.3 v1(38.1,26.924) 38.1,30.607 35.814,32.893 35.814,35.56 38.354,38.1 53.848,38.1 67.691,51.943 67.691,70.104 66.548,71.247 54.356,71.247 53.34,70.231 LM100.4
  Bottom Layer w0.8: LM100.4 53.34,69.723
RST: C113.1 C114.1 D105.1 P100.4 R125.2 R126.2 U101.1 | length 60.9
  Top Layer w0.3: U101.1 50.298,43.567 51.054,44.323 C114.1 C113.1 ; v2(57.912,38.735) C113.1 ; R125.2 D105.1 C113.1
  Bottom Layer w0.3: R126.2 P100.4 40.64,29.972 37.084,33.528 37.084,34.925 38.735,36.576 55.753,36.576 v2(57.912,38.735)
RXD: R129.1 U101.2 | length 75
  Top Layer w0.3: v1(16.51,22.86) R129.1 ; v1(26.67,53.086) 28.067,54.483 48.641,54.483 49.498,53.626 U101.2
  Bottom Layer w0.3: v1(16.51,22.86) 19.431,22.86 19.939,23.368 19.939,46.355 v1(26.67,53.086)
RXD_PC: JF100.2 U100.7 | length 15.1
  Top Layer w0.5: v1(15.113,31.623) 15.113,34.544 17.78,37.211 U100.7
  Bottom Layer w0.5: JF100.2 13.625,30.135 v1(15.113,31.623)
  Bottom Layer w0.8: JF100.2 12.619,30.135
TXD: R127.1 U101.3 | length 69.3
  Top Layer w0.3: v1(24.13,22.86) R127.1 ; v1(26.67,51.435) 28.956,53.721 47.752,53.721 48.698,52.775 U101.3
  Bottom Layer w0.3: v1(24.13,22.86) 22.987,22.86 22.479,23.368 22.479,47.244 v1(26.67,51.435)
TXD_PC: JF100.3 U100.8 | length 9.5
  Top Layer w0.5: v1(13.843,35.052) 16.51,37.719 U100.8
  Bottom Layer w0.5: JF100.3 11.696,32.905 v1(13.843,35.052)
VCC: C101.2 C102.2 C103.1 C112.2 D105.2 L103.2 LM100.2 P100.5 R108.1 R119.2 R123.1 R124.2 R125.1 R128.1 R130.2 R132.1 R133.1 U100.16 U101.7 | length 287.1
  Top Layer w0.3: U101.7 45.498,44.577 C102.2@45.498,44.881
  Top Layer w0.5: R108.1 19.05,20.955 ; R130.2 19.05,20.955 ; R128.1 21.59,20.955 ; C112.2 24.13,48.26 ; U100.16 25.4,31.623 26.67,30.353 C103.1 29.464,28.194 ; R123.1 28.321,20.955 ; v1(42.926,68.453) 40.767,66.294 40.767,58.166 ; v1(43.18,25.146) R132.1 ; C102.2 v2(44.831,46.609) ; LM100.2@50.673,68.453 LM100.2 ; v2(52.07,46.609) 52.07,58.166 ; R133.1 52.07,58.166 ; v2(68.072,46.609) R125.1 62.865,47.752 D105.2 61.214,58.166 52.07,58.166 ; 19.05,20.955 21.59,20.955 ; 21.59,20.955 28.321,20.955 ; 24.13,48.26 24.13,55.931 L103.2 40.767,55.931 40.767,58.166 ; 24.13,48.26 29.464,48.26 29.464,28.194 ; 28.321,20.955 29.464,20.955 29.464,28.194 ; 40.767,58.166 52.07,58.166
  Bottom Layer w0.5: v1(42.926,68.453) C101.2 LM100.2@50.673,68.453 ; P100.5 v1(43.18,25.146) 68.072,25.146 ; v2(44.831,46.609) v2(52.07,46.609) ; v2(68.072,46.609) 68.072,25.146 ; R124.2 R119.2 68.072,6.477 68.072,25.146
VIN: J100.3 SW100.2 | length 13.8
  Bottom Layer w1.5: J100.3 14.624,61.487 19.05,65.913 SW100.2
VREF: C116.2 R121.2 U101.21 U102.1 U102.3 | length 29.6
  Top Layer w0.3: U101.21 47.898,30.969 49.784,29.083 53.213,29.083 53.848,28.448 53.848,27.432
  Top Layer w0.5: R121.2 51.435,26.67 cw(c52.197,26.67) 52.197,27.432 53.848,27.432 ; U102.3 53.848,27.432 ; U102.1 56.896,27.432 ; C116.2 59.309,26.67 ccw(c58.547,26.67) 58.547,27.432 56.896,27.432 ; 53.848,27.432 56.896,27.432
XT1: C118.1 U101.9 Y100.1 | length 14.7
  Top Layer w0.3: v1(39.116,41.91) 40.888,40.138 U101.9
  Bottom Layer w0.3: C118.1 Y100.1 35.56,43.053 36.703,41.91 v1(39.116,41.91)
  Bottom Layer w0.8: 34.925,44.958 Y100.1 35.56,44.323
XT2: C117.1 U101.10 Y100.2 | length 11.6
  Top Layer w0.3: v1(38.989,39.878) 40.1,39.878 40.64,39.338 U101.10
  Bottom Layer w0.3: C117.1 Y100.2 v1(38.989,39.878)
  Bottom Layer w0.8: Y100.2@35.052,39.878 Y100.2 36.195,39.878
pads on no net: BN100.1 BN100.6 JF100.1 JF100.9 JF100.10 JF100.11 KEY100.3 KEY100.4 KEY101.3 KEY101.4 LM100.7 LM100.8 LM100.9 LM100.10 SW100.0 SW100.3 U100.11 U100.12 U100.13 U100.14 U101.29 U101.30 U101.31 U101.32
copper on no net: | length 9.1
  Bottom Layer w1: 8.403,5.99 9.546,5.99 ; 8.636,37.084 8.636,38.227 ; 11.43,26.289 11.43,27.432 ; 12.633,5.99 13.776,5.99 ; 23.516,5.99 24.659,5.99 ; 27.746,5.99 28.889,5.99 ; 38.608,7.62 38.608,8.763 ; 38.608,11.43 38.608,12.573

## Polygon pours and split planes (outlines as drawn)
AGND on Top Layer "agnd6" (solid, pour order 1002): 132.08,76.327 132.08,0.127 118.058,0.127 69.85,0.127 69.85,54.102 69.85,76.327
GND on Top Layer "agnd5" (solid, pour order 1003): 0,0.127 68.072,0.127 68.072,11.557 68.072,73.152 55.118,73.152 44.577,73.152 44.577,63.754 44.577,49.149 0,49.149
AGND on Top Layer "agnd4" (solid, pour order 1005): 0,76.327 43.18,76.327 43.18,55.88 43.18,50.673 0,50.673 0,76.327
AGND on Bottom Layer "agnd1" (solid, pour order 1000): 132.08,76.327 132.08,0.127 118.058,0.127 69.85,0.127 69.85,54.102 69.85,76.327
GND on Bottom Layer "agnd3" (solid, pour order 1001): 0,0.127 68.072,0.127 68.072,11.557 68.072,73.152 55.118,73.152 44.577,73.152 44.577,63.754 44.577,49.149 0,49.149
AGND on Bottom Layer "agnd2" (solid, pour order 1004): 0,76.327 43.18,76.327 43.18,55.88 43.18,50.673 0,50.673 0,76.327

## Keep-outs
Keep-Out Layer:
  lines w0.2: 0,0.127 132.08,0.127 132.08,76.327 0,76.327 0,0.127

## Other copper
Top Layer:
  text "Ni-MH Charger v1.1" at 71.12,2.032 h1
  text "Designed by aleyn.wu" at 91.44,2.032 h1
  text "Update 2009-10-23" at 113.665,2.032 h1

## Silkscreen, mask and mechanical layers (free items; w line width, h text height)
Top Overlay:
  text "Power DC 5V" at 14.605,73.533 h1
  text "Battery 1" at 83.947,5.969 h1
  text "Battery 2" at 114.681,5.969 h1
  text "KEY1" at 9.525,3.429 h1
  text "KEY2" at 24.511,3.429 h1
  text "RESET" at 38.608,3.429 h1

## Text inside footprints (layer, text, board x,y; h text height)
BT100: Top Overlay "+" at 83.96,9.583 h1.15
BT101: Top Overlay "+" at 114.44,9.583 h1.15
JF100: Top Overlay "1" at 14.931,27.115 h1.5 r90; Top Overlay "5" at 14.931,37.945 h1.5 r90; Top Overlay "9" at 5.531,36.56 h1.5 r90; Top Overlay "6" at 5.531,28.25 h1.5 r90
LM100: Top Overlay "13" at 68.072,65.532 h1.27; Top Overlay "14" at 68.072,68.072 h1.27; Top Overlay "1" at 47.752,65.532 h1.27; Top Overlay "2" at 47.752,68.072 h1.27
Q100: Top Overlay "1" at 78.49,66.818 h1.5; Top Overlay "2" at 80.78,66.818 h1.5; Top Overlay "3" at 83.32,66.818 h1.5
Q101: Top Overlay "3" at 83.32,39.005 h1.5; Top Overlay "2" at 80.78,39.005 h1.5; Top Overlay "1" at 78.49,39.005 h1.5
Q104: Top Overlay "1" at 108.97,66.818 h1.5; Top Overlay "2" at 111.26,66.818 h1.5; Top Overlay "3" at 113.8,66.818 h1.5
Q105: Top Overlay "3" at 113.8,39.005 h1.5; Top Overlay "2" at 111.26,39.005 h1.5; Top Overlay "1" at 108.97,39.005 h1.5